# Altium PCB MBUSSlave.PcbDoc
Units mil, origin at the board's own origin, x right, y up, seen from the top; angles counter-clockwise.
Board outline 3858.27 x 1771.65 mil, 2 copper layers (Top Layer, Bottom Layer); 64 components, 46 nets, 181 pads, 29 vias.
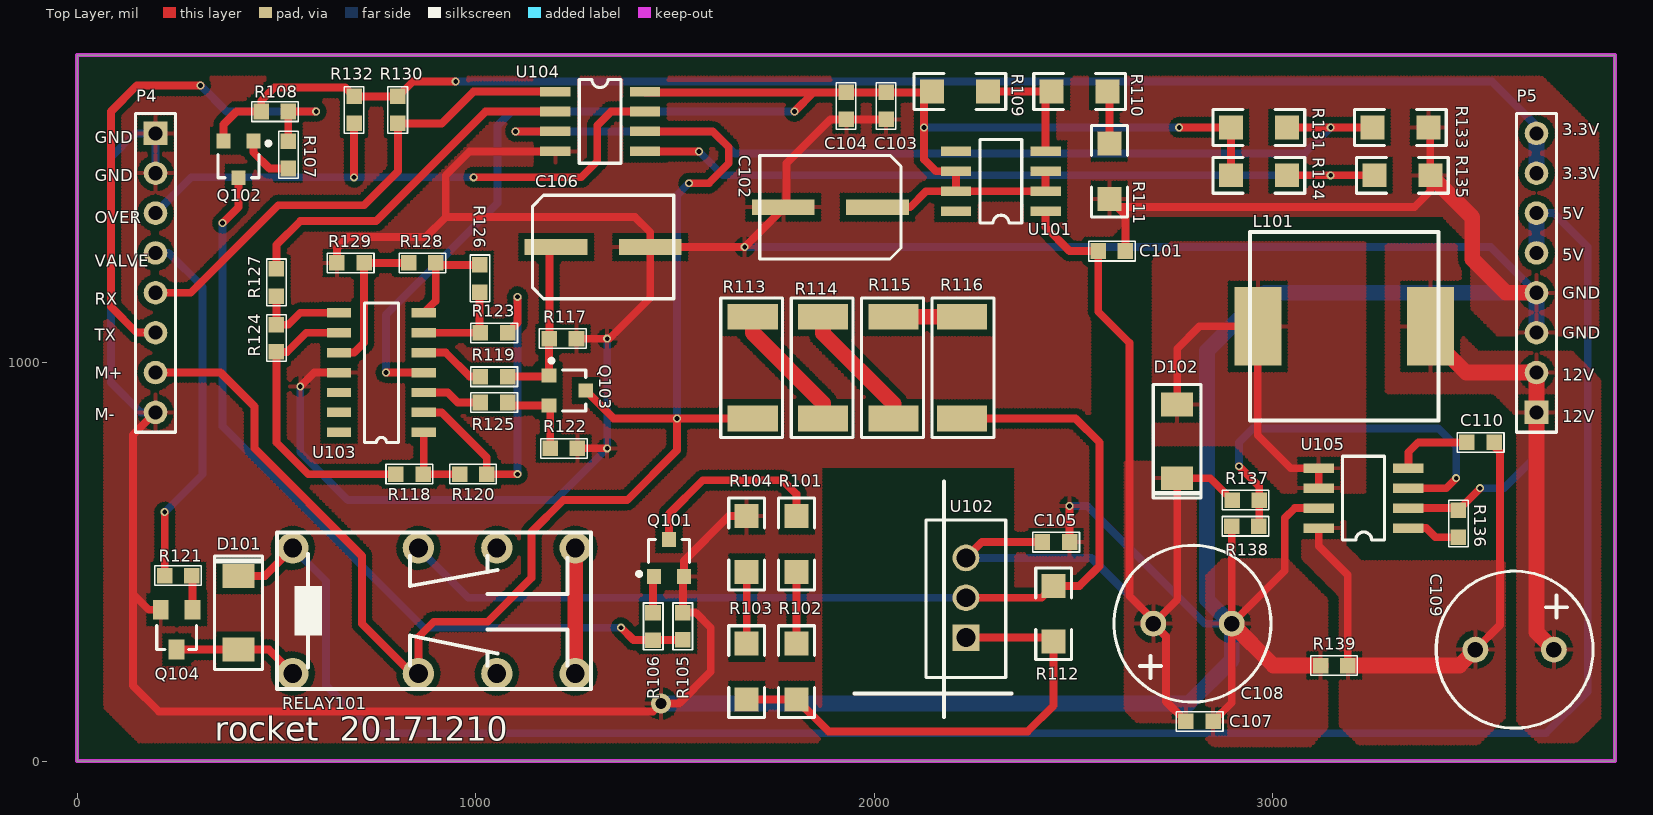
[diagram p0: Top Layer view]
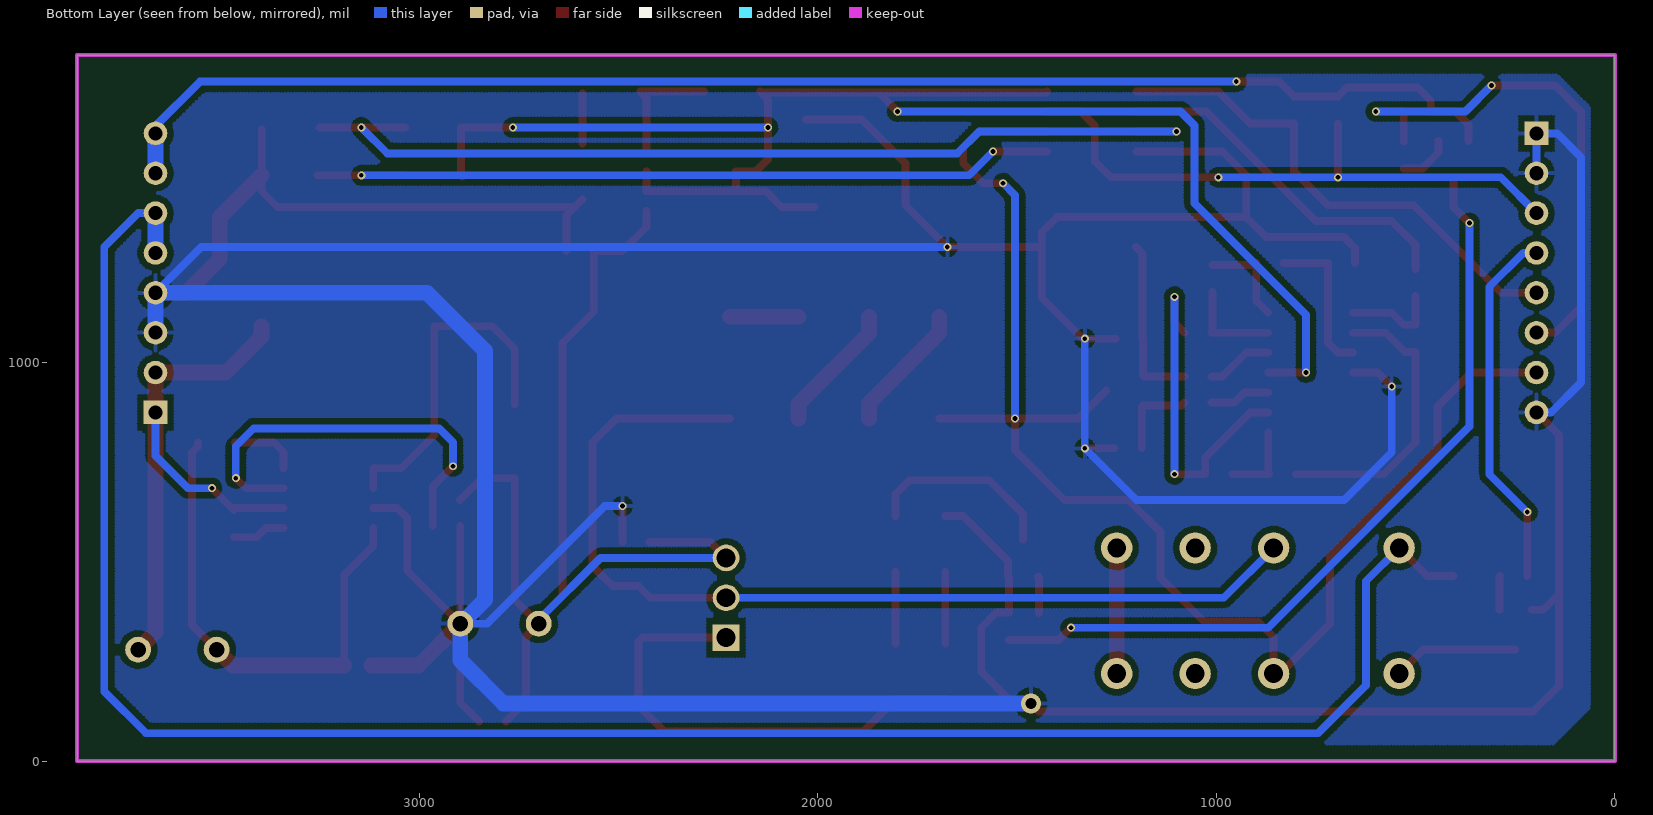
[diagram p1: Bottom Layer view, seen from below]

## Layer stack, top to bottom
Top Layer: signal copper 1.4
Dielectric: dielectric 12.6, FR-4, Dk 4.8
Bottom Layer: signal copper 1.4

## Board outline
0,0 3858.27,0 3858.27,1771.65 0,1771.65

## Design rules (kind name [scope] priority, off if disabled: settings)
Clearance [All] p1: gap=15.75
ComponentClearance [All] p1: gap=10 collisioncheckmode=3 verticalgap=10
PolygonConnect [All] p1: connectstyle=Relief reliefconductorwidth=10 reliefentries=4 polygonreliefangle="90 Angle"
RoutingVias [All] p1: holewidth=28 width=50 viastyle="Through Hole" minholewidth=12 minwidth=20 maxholewidth=28 maxwidth=50
SolderMaskExpansion [All] p1: expansion=4
TestPointUsage [All] p1: valid=0 allowmultiple=FALSE
Testpoint [All] p1: side=15 testpointundercomponent=TRUE minsize=40 maxsize=100 preferedsize=60 minholesize=0 maxholesize=40 preferedholesize=32 testpointgrid=1 style=1023 order=0-112345678
Width [All] p1: maxlimit=39.37 minlimit=10 preferedwidth=10
18 further rules are at their usual default settings.

## Components (designator, comment, footprint, x,y, rotation, side; value= is the part's Value field where it differs from the comment)
C101 "Cap" 0603 2630,1280 r0 top
C102 "Cap Pol3" C_6.3_5.3 1890,1390 r180 top
C103 "Cap" 0603 2030,1610 r270 top
C104 "Cap" 0603 1930,1610 r270 top
C105 "Cap" 0603 2490,550 r0 top
C106 "Cap Pol3" C_6.3_5.3 1320,1290 r0 top
C107 "Cap" 0603 2850,100 r0 top
C108 "Cap Pol1" "C_DJ - duplicate" 2700,345 r180 top
C109 "Cap Pol1" "C_DJ - duplicate" 3705,280 r0 top
C110 "Cap" 0603 3555,800 r0 top
D101 "M7" M7-4007 405,280 r90 top
D102 "SS34" M7-4007 2760,895 r270 top
L101 "Inductor" L12*12 3415,855 r90 top
P4 "Header 8" HDR1X8 196.85,1575.16 r270 top
P5 "Header 8" HDR1X8 3661.42,875.16 r90 top
Q101 "NPN" SOT-23 1485,510 r0 top
Q102 "PNP" SOT-23 405,1510 r180 top
Q103 "BAW56" SOT-23 1230,930 r270 top
Q104 "2N3904" NPN-PNP 290,380 r180 top
R101 "Res1" 1206 1805,545 r90 top
R102 "Res1" 1206 1805,225 r90 top
R103 "Res1" 1206 1680,225 r270 top
R104 "Res1" 1206 1680,545 r270 top
R105 "Res1" 0603 1520,305 r270 top
R106 "Res1" 0603 1445,372 r90 top
R107 "Res1" 0603 530,1555 r90 top
R108 "Res1" 0603 530,1630 r0 top
R109 "Res1" 1206 2215,1680 r0 top
R110 "Res1" 1206 2515,1680 r0 top
R111 "Res1" 1206 2590,1480 r270 top
R112 "Res1" 1206 2450,370 r270 top
R113 "Res1" 2512 1695,860 r90 top
R114 "Res1" 2512 1871.67,860 r90 top
R115 "Res1" 2512 2048.33,860 r90 top
R116 "Res1" 2512 2220,1115 r270 top
R117 "Res1" 0603 1185,1060 r180 top
R118 "Res1" 0603 800,720 r180 top
R119 "Res1" 0603 1080,965 r0 top
R120 "Res1" 0603 960,720 r180 top
R121 "Res2" 0603 220,465 r180 top
R122 "Res1" 0603 1255,785 r0 top
R123 "Res1" 0603 1080,1075 r0 top
R124 "Res1" 0603 500,1095 r90 top
R125 "Res1" 0603 1080,900 r0 top
R126 "Res1" 0603 1010,1245 r90 top
R127 "Res1" 0603 500,1235 r90 top
R128 "Res1" 0603 900,1250 r0 top
R129 "Res1" 0603 720,1250 r0 top
R130 "Res1" 0603 805,1600 r270 top
R131 "Res1" 1206 2965,1590 r0 top
R132 "Res1" 0603 695,1600 r270 top
R133 "104(Good)" 1206 3320,1590 r0 top
R134 "Res1" 1206 2965,1470 r0 top
R135 "Res1" 1206 3325,1470 r0 top
R136 "Res2" 0603 3465,630 r90 top
R137 "Res2" 0603 2898,655 r180 top
R138 "Res2" 0603 2965,590 r0 top
R139 "Res2" 0603 3120,240 r180 top
RELAY101 "Relay-DPDT" Relay-DPDP 1250,535 r270 top
U101 "LM317_8" SOP8 2430,1380 r90 top
U102 "LM317_3" LM317_3 2230,310 r90 top
U103 "LM224A" SOP14 870,825 r180 top
U104 "LM393" SOP8 1200,1680 r270 top
U105 "AX5203" SOP8 3340,585 r90 top

## Footprints (in the part's own frame and the unit in brackets; to place one, negate y for a bottom-side part, rotate by r counter-clockwise, add the part's x,y. Pads: shape width x height; smd on the part's side, far side on the other; paste and mask are expansions set on the pad)
0603 [mil]
  rect 39x39 smd: 1(0,0) 2(-68,0)
  silkscreen extent -92,-25 25,24
1206 [mil]
  rect 60x60 smd: 1(-70,0) 2(70,0)
  silkscreen extent -115,-45 115,45, body extent -75,-35 75,35, height 39
2512 [mm]
  rect 1.65x3.2 smd: 1(0,0) 2(6.48,0)
  silkscreen extent -1.21,-1.91 7.68,2.03
C_6.3_5.3 [mm]
  rect 4x1 smd: 1(-3,0) 2(3,0)
  silkscreen extent -4.5,-3.3 4.5,3.3
"C_DJ - duplicate" [mil]
  round 65 hole 39: 1(0,0) 2(-196.85,0)
  silkscreen extent -295,-197 98,197
HDR1X8 [mm] "Connector; Header; 8 Position"
  rect 1.5x1.5 hole 0.9: 1(0,0)
  round 1.5 hole 0.9: 2(2.54,0) 3(5.08,0) 4(7.62,0) 5(10.16,0) 6(12.7,0) 7(15.24,0) 8(17.78,0)
  silkscreen extent -1.27,-1.27 19.05,1.27
L12*12 [mm]
  rect 5x3 smd: 1(6,11.5) 2(6,0.5)
  silkscreen extent 0,0 12,12
LM317_3 [mm]
  rect 1.7x1.7 hole 1.2: 1(0,0)
  round 1.7 hole 1.2: 2(2.54,0) 3(5.08,0)
  silkscreen extent -2.54,-2.54 7.49,2.54
M7-4007 [mil]
  rect 60x80 smd: 1(0,0) 2(185,0)
  silkscreen extent -50,-60 235,60
NPN-PNP [mil]
  rect 40x50 smd: B(0,0) C(40,100) E(80,0)
  silkscreen extent -10,40 90,100
Relay-DPDP [mm]
  round 2 hole 1.2: 1(0,-10) 2(0,-5) 3(0,0) 4(8,-10) 5(8,-5) 6(8,0) 7(0,-18) 8(8,-18)
  silkscreen extent -1,-19 9,1
SOP8 [mil]
  rect 24x76 smd: 1(0,0) 2(50,0) 3(100,0) 4(150,0) 5(150,225) 6(100,225) 7(50,225) 8(0,225)
  silkscreen extent -30,60 180,165
SOP14 [mm]
  rect 1.55x0.6 smd: 1(0,0) 2(0,-1.27) 3(0,-2.54) 4(0,-3.81) 5(0,-5.08) 6(0,-6.35) 7(0,-7.62) 8(5.4,-7.62) 9(5.4,-6.35) 10(5.4,-5.08) 11(5.4,-3.81) 12(5.4,-2.54) 13(5.4,-1.27) 14(5.4,0)
  silkscreen extent 1.61,-8.25 3.79,0.64
SOT-23 [mm]
  rect 0.9x0.95 smd: 1(0,1.175) 2(-0.95,-1.175) 3(0.95,-1.175)
  silkscreen extent -2.03,-1.14 1.3,1.18

## Part data
C101 C103 C104 C105 C107 C110: "Capacitor"
C102 C106: "Polarized Capacitor (Surface Mount)"
C108 C109: "Polarized Capacitor (Radial)"
D101 D102: library part "Diode 1N4007", "1 Amp General Purpose Rectifier"
P4 P5: "Header, 8-Pin"
Q101 Q104: "NPN General Purpose Amplifier"
Q102: "PNP Bipolar Transistor"
R101 R102 R103 R104 R105 R106 R107 R108 R109 R110 R111 R112 R113 R114 R115 R116 R117 R118 R119 R120 R121 R122 R123 R124 R125 R126 R127 R128 R129 R130 R131 R132 R134 R135 R136 R137 R138 R139: "Resistor"
R133: library part Res1, "Resistor"
RELAY101: "Dual-Pole Dual-Throw Relay"

## Via types
v1: diameter 20, hole 12, Top Layer to Bottom Layer, 28 vias
v2: diameter 50, hole 28, Top Layer to Bottom Layer, 1 vias

## Nets (pads, with @x,y where several pads share a name; then routed paths per layer and width w, separated by ;. In a path a pad name is that pad's centre, name@x,y a point inside that pad or via, vN(x,y) a via of type N, cw(c..) or ccw(c..) an arc to the next point about the centre after c; other vN are vias at no path point)
GND: C101.1 C102.2 C103.1 C104.1 C105.1 C106.2 C107.1 C108.2 P4.1 P4.2 P4.8 P5.3 P5.4 Q101.3 Q104.E R104.1 R105.2 R111.2 R117.2 R122.1 R129.2 R133.2 R135.2 R138.2 R139.1 U103.11 U104.4 U105.7 | length 16405.1
  Top Layer w19.68: 140,420 180,380 Q104.E ; P4.8 140,818.31 140,190 205,125 1445,125 v2(1465,145) 1510,145 1590,225 1590,335 1552,373 R105.2 1520,461.34 Q101.3 1522.4,502.4 ; v1(560,940) 595,975 U103.11 ; R129.2 652,1287 680,1315 875,1315 925,1365 ; U104.4 985,1530 925,1470 925,1365 ; R117.2 1335,1060 1438.11,1163.11 1438.11,1326.89 1400,1365 925,1365 ; R122.1 v1(1330,785) ; C106.2 v1(1675,1290) 1780,1395 1780,1500 1890,1610 C103.1 ; 1522.5,502.5 1635,615 R104.1 ; C105.1 v1(2490,640) ; R111.2 2630,1370 C101.1 ; R111.2@2610,1390 3355,1390 3395,1430 R133.2@3395,1585 ; C107.1 2896.85,146.85 C108.2 3030,478.15 3030,610 3055,635 U105.7 ; C108.2@2897,345.15 R138.2
  Top Layer w39.37: C108.2 3001.85,240 R139.1 ; R135.2 3500,1365 3500,1260 3584.84,1175.16 P5.4
  Bottom Layer w19.68: P4.8 159.84,875.16 85,950 85,1515 145.16,1575.16 P4.1 P4.2 ; v1(560,940) 560,775 680,655 1200,655 v1(1330,785) v1(1330,1060) ; v1(1675,1290) 3546.57,1290 P5.4 ; v1(2490,640) 2535,640 2830,345 C108.2
  Bottom Layer w39.37: v2(1465,145) 2788.7,145 2896.85,253.15 C108.2 ; C108.2@2895,345 2835,405 2835,1030 2980.16,1175.16 P5.4 P5.3
M+: P4.7 Q103.1 R113.1 RELAY101.4 U104.6 | length 3652.2
  Top Layer w19.68: P4.7 359.84,975.16 445,890 445,785 715,515 715,345 839.96,220.04 RELAY101.4 856.3,311.3 895,350 1030,350 1140,460 1140,575 1220,655 1380,655 1505,780 v1(1505,860) ; Q103.1 1346.26,860 R113.1 ; U104.6 1595,1580 1635,1540 1635,1500 1585,1450 v1(1535,1450)
  Bottom Layer w19.68: v1(1505,860) 1505,1420 v1(1535,1450)
NetC106_1: C106.1 Q103.2 R117.1 R119.1 | length 433.1
  Top Layer w19.68: R119.1 1181.34,965 Q103.2 R117.1@1183.74,1058.74 ; R117.1 1185,1273.11 C106.1
NetC110_2: C110.2 U105.4 | length 172.4
  Top Layer w19.68: U105.4 3340,775 3365,800 3462,800
NetD101_1: D101.1 Q104.C RELAY101.8 | length 316.2
  Top Layer w19.68: Q104.C 481.38,280 RELAY101.8
NetD102_1: D102.1 L101.1 U105.5 U105.6 | length 876
  Top Layer w19.68: D102.1 2760,1035 2816.22,1091.22 L101.1 2962.24,817.76 3045,735 U105.5 U105.6
NetQ101_1: Q101.1 R101.2 | length 488.4
  Top Layer w19.68: Q101.1 1485,620 1570,705 1770,705 1805,670 R101.2
NetQ101_2: Q101.2 R106.1 | length 92.8
  Top Layer w19.68: R106.1 1445,461.14 Q101.2
NetQ102_1: Q102.1 R105.1 R106.2 | length 2017.3
  Top Layer w19.68: v1(365,1350) 405,1390 Q102.1 ; v1(1365,335) 1396,304 R105.1@1520,304
  Bottom Layer w19.68: v1(365,1350) 365,840 870,335 v1(1365,335)
NetQ102_2: Q102.2 R107.2 | length 133.1
  Top Layer w19.68: Q102.2 442.4,1527.6 483,1487 R107.2
NetQ103_3: Q103.3 R122.2 R125.1 | length 211.1
  Top Layer w19.68: R125.1 1087.4,892.6 Q103.3 ; R122.2 Q103.3@1187,889.34
NetQ104_B: Q104.B R121.2 | length 85.8
  Top Layer w19.68: R121.2 290,463 Q104.B
NetR101_1: R101.1 R102.2 | length 180
  Top Layer w19.68: R102.2 R101.1
NetR102_1: R102.1 R103.2 R112.2 U102.1 | length 1214.2
  Top Layer w19.68: R103.2 R102.1 1885,75 2385,75 2450,140 R112.2 2440,310 U102.1
NetR103_1: R103.1 R104.2 | length 180
  Top Layer w19.68: R103.1 R104.2
NetR109_2: R109.2 R110.1 U101.4 | length 316.2
  Top Layer w19.68: R109.2 R110.1 2430,1665 U101.4
NetR110_2: R110.2 R111.1 | length 125
  Top Layer w19.68: R111.1 R110.2@2590,1675
NetR112_1: R112.1 R116.2 RELAY101.1 U102.2 | length 2473.4
  Top Layer w19.68: R116.2 2505.12,859.88 2565,800 2565,490 2515,440 R112.1 2420,410 U102.2
  Bottom Layer w19.68: RELAY101.1 981.3,410 U102.2
NetR113_2: R113.2 R114.1 | length 328.3
  Top Layer w39.37: R113.2 1695,1075 1871.67,898.33 R114.1
NetR114_2: R114.2 R115.1 | length 328.3
  Top Layer w39.37: R114.2 1871.67,1073.33 2048.33,896.67 R115.1
NetR115_2: R115.2 R116.1 | length 171.5
  Top Layer w39.37: R115.2@2048.45,1115 R116.1
NetR118_1: R118.1 R124.2 U103.9 | length 737.4
  Top Layer w19.68: U103.9 575,1075 527,1027 R124.2 500,800 580,720 R118.1
NetR118_2: R118.2 R120.1 U103.1 | length 195
  Top Layer w19.68: R118.2 R120.1 ; R118.2@870,722 U103.1
NetR119_2: R119.2 U103.5 | length 166.9
  Top Layer w19.68: U103.5 925,1025 985,965 R119.2
NetR120_2: R120.2 R123.1 U103.2 | length 869.2
  Top Layer w19.68: U103.2 915,875 1028,762 R120.2 v1(1105,720) ; R123.1 1105,1100 v1(1105,1165)
  Bottom Layer w19.68: v1(1105,720) v1(1105,1165)
NetR123_2: R123.2 R126.2 U103.6 | length 244.8
  Top Layer w19.68: U103.6 R123.2 1010,1077 R126.2
NetR124_1: R124.1 R127.2 U103.8 | length 241.8
  Top Layer w19.68: R127.2 R124.1 530,1095 560,1125 U103.8
NetR125_2: R125.2 U103.3 | length 152.4
  Top Layer w19.68: U103.3 930,925 955,900 R125.2
NetR126_1: R126.1 R128.1 U103.7 | length 249.5
  Top Layer w19.68: U103.7 900,1155 R128.1 905,1245 R126.1
NetR127_1: R127.1 U104.2 | length 898.8
  Top Layer w19.68: R127.1 500,1295 560,1355 750,1355 1025,1630 U104.2
NetR128_2: R128.2 R129.1 U103.10 | length 385
  Top Layer w19.68: U103.10 695,1025 720,1050 R129.1 R128.2
NetR131_2: R131.2 R133.1 U104.3 | length 2409.7
  Top Layer w19.68: v1(1100,1580) U104.3 ; R131.2 R133.1
  Bottom Layer w19.68: v1(1100,1580) 1595,1580 1650,1525 3080,1525 v1(3145,1590)
NetR134_2: R134.2 R135.1 U104.5 | length 1964.9
  Top Layer w19.68: U104.5 v1(1560,1530) ; R134.2 R135.1
  Bottom Layer w19.68: v1(1560,1530) 1620,1470 v1(3145,1470)
NetR136_2: R136.2 U105.1 | length 134.5
  Top Layer w19.68: U105.1 3385,585 3408,562 R136.2
NetR137_2: R137.2 R138.1 U105.3 | length 1018.6
  Top Layer w19.68: v1(2915,740) 2966,689 R138.1@2966,591 ; U105.3 3435,685 v1(3460,710)
  Bottom Layer w19.68: v1(2915,740) 2915,800 2950,835 3415,835 3460,790 v1(3460,710)
NetRELAY101_3: RELAY101.3 RELAY101.6 | length 315
  Top Layer w39.37: RELAY101.6 RELAY101.3
OVER: P4.3 R132.1 U104.7 | length 1521.4
  Top Layer w19.68: v1(695,1465) R132.1 ; v1(995,1465) 1265,1465 1305,1505 1305,1595 1340,1630 U104.7
  Bottom Layer w19.68: P4.3 286.69,1465 v1(995,1465)
RX: P4.5 R130.1 U104.1 | length 1282.6
  Top Layer w19.68: P4.5 285.16,1175.16 505,1395 720,1395 805,1480 R130.1 915,1600 995,1680 U104.1
SGND: C109.2 C110.1 R139.2 U105.8 | length 1263.8
  Top Layer w19.68: U105.8 3115,540 3188,467 R139.2 ; C109.2 3570,341.85 3570,775 3555,790 C110.1
  Top Layer w39.37: R139.2 3468.15,240 C109.2
TX: P4.6 R107.1 R108.1 | length 1342.6
  Top Layer w19.68: P4.6 149.84,1075.16 85,1140 85,1630 150,1695 v1(310,1695) ; R107.1 R108.1 v1(600,1630)
  Bottom Layer w19.68: v1(310,1695) 375,1630 v1(600,1630)
VALVE: P4.4 R121.1 | length 917.8
  Top Layer w19.68: R121.1 v1(220,625)
  Bottom Layer w19.68: P4.4 229.84,1275.16 315,1190 315,720 v1(220,625)
VCC_3.3V: P5.7 P5.8 Q102.3 R108.2 R130.2 R132.2 | length 3578.3
  Top Layer w19.68: Q102.3 367.6,1597.6 400,1630 R108.2 462,1657 495,1690 673,1690 R132.2 R130.2 842,1705 v1(950,1705)
  Bottom Layer w19.68: v1(950,1705) 3550,1705 3661.42,1593.58 P5.8
  Bottom Layer w39.37: P5.7 P5.8
VCC_5V: D101.2 P5.5 P5.6 RELAY101.7 | length 5182
  Top Layer w19.68: D101.2 471.34,465 RELAY101.7
  Bottom Layer w19.68: RELAY101.7 625,451.34 625,190 745,70 3685,70 3790,175 3790,1290 3704.84,1375.16 P5.6
  Bottom Layer w39.37: P5.5 P5.6
VCC_12V: C109.1 L101.2 P5.1 P5.2 R136.1 U105.2 | length 1531.7
  Top Layer w19.68: U105.2 3460,635 R136.1 v1(3520,685)
  Top Layer w39.37: L101.2 3395.31,1064.68 3484.84,975.16 P5.2 3661.42,323.58 C109.1
  Bottom Layer w19.68: v1(3520,685) 3580,685 3661.42,766.42 P5.1
VCC_29V: C102.1 C103.2 C104.2 R109.1 R131.1 R134.1 U101.2 U101.3 U101.6 U101.7 U103.4 U104.8 | length 4080.6
  Top Layer w19.68: v1(775,975) U103.4 ; U104.8 1427,1678 R109.1@2143,1678 ; v1(1800,1630) 1848,1678 ; C102.1 2090,1390 2130,1430 U101.2 U101.3 ; R109.1 2125,1660 2125,1510 2155,1480 U101.6 U101.7 ; v1(2765,1590) R131.1 R134.1 R134.1@2892,1467
  Bottom Layer w19.68: v1(775,975) 775,1120 1055,1400 1055,1595 1090,1630 v1(1800,1630) ; v1(2125,1590) v1(2765,1590)
VCC_38V: C101.2 C105.2 C107.2 C108.1 D102.2 R137.1 U101.1 U102.3 | length 2771.4
  Top Layer w19.68: U102.3 2270,550 C105.2 ; U101.1 2430,1340 2490,1280 C101.2 2562,1128 2640,1050 2640,415 2700,355 C108.1 ; C107.2 2732,150 2732,313 C108.1 ; R137.1 2843,710 D102.2 2760,405 C108.1
  Bottom Layer w19.68: U102.3 2545,510 2700,355 C108.1
pads on no net: RELAY101.2 RELAY101.5 U101.5 U101.8 U103.12 U103.13 U103.14

## Polygon pours and split planes (outlines as drawn)
GND on Top Layer "Top Layer-No Net" (hatched 90Degree grid 7.87 track 10, remove dead copper): 3135,85 3135,405 3055,485 3035,505 2875,505 2840,470 2835,465 2835,185 2835,55 2850,40 3095,40
GND on Top Layer "Top Layer-No Net" (hatched 90Degree grid 7.87 track 10, remove dead copper): 70,1635 150,1715 930,1715 3675,1715 3780,1610 3815,1575 3815,1125 3815,1085 3795,1065 3790,1070 3650,1070 3565,1070 3525,1110 3500,1135 3500,1295 3460,1335 3425,1370 3200,1370 2645,1370 2555,1280 2540,1265 2540,715 2540,160 2540,155 2435,50 2185,50 155,50 75,130 70,135 70,1635
VCC_38V on Top Layer "Top Layer-No Net" (hatched 90Degree grid 7.87 track 10, remove dead copper): 2700,750 2805,750 2805,100 2730,100 2660,100 2640,120 2630,130 2630,405 2630,750
NetD102_1 on Top Layer "Top Layer-No Net" (hatched 90Degree grid 7.87 track 10, remove dead copper): 3230,675 3025,675 2990,710 2905,795 2825,795 2700,795 2700,920 2700,1255 2745,1300 3045,1300 3230,1300
SGND on Top Layer "Top Layer-No Net" (hatched 90Degree grid 7.87 track 10, remove dead copper): 3075,600 3075,510 3125,460 3170,415 3170,100 3170,90 3215,45 3515,45 3570,100 3580,110 3580,500 3220,500 3180,540 3180,600
VCC_12V on Top Layer "Top Layer-No Net" (hatched 90Degree grid 7.87 track 10, remove dead copper): 3285,1295 3470,1295 3470,1070 3515,1025 3745,1025 3750,1025 3795,980 3820,955 3820,275 3820,110 3760,50 3665,50 3615,100 3615,865 3555,925 3500,925 3285,925
GND on Bottom Layer "Top Layer-No Net" (hatched 90Degree grid 7.87 track 10, remove dead copper): 3760,45 155,45 65,135 65,180 65,1640 145,1720 1510,1720 3675,1720 3820,1575 3820,1485 3820,105 3760,45

## Keep-outs
Keep-Out Layer:
  the board outline again, w10

## Other copper
Top Layer:
  pour cut-out: 1865,80 1865,740.23 2355,740.23 2355,50 1895,50

## Silkscreen, mask and mechanical layers (free items; w line width, h text height)
Top Overlay:
  lines w10: 1950.39,170 2344.09,170 ; 2175,111.22 2175,701.77
  text "3.3V" at 3726.4,1570 h30
  text "GND" at 45,1550 h30
  text "3.3V" at 3726.4,1460 h30
  text "GND" at 45,1455 h30
  text "5V" at 3726.4,1360 h30
  text "OVER" at 45,1350 h30
  text "5V" at 3726.4,1255 h30
  text "VALVE" at 45,1240 h30
  text "GND" at 3726.4,1160 h30
  text "RX" at 45,1145 h30
  text "GND" at 3726.4,1060 h30
  text "TX" at 45,1055 h30
  text "M+" at 45,960 h30
  text "12V" at 3726.4,955 h30
  text "M-" at 45,855 h30
  text "12V" at 3726.4,850 h30
  text "rocket  20171210" at 345,51.47 h60